# Altium PCB PCB2.PcbDoc
Units mil, origin at the board's own origin, x right, y up, seen from the top; angles counter-clockwise.
Board outline 4330.71 x 1181.1 mil, 2 copper layers (Top Layer, Bottom Layer); 9 components, 8 nets, 43 pads, 0 vias.
Unrouted connection lines stored in the file: 14.
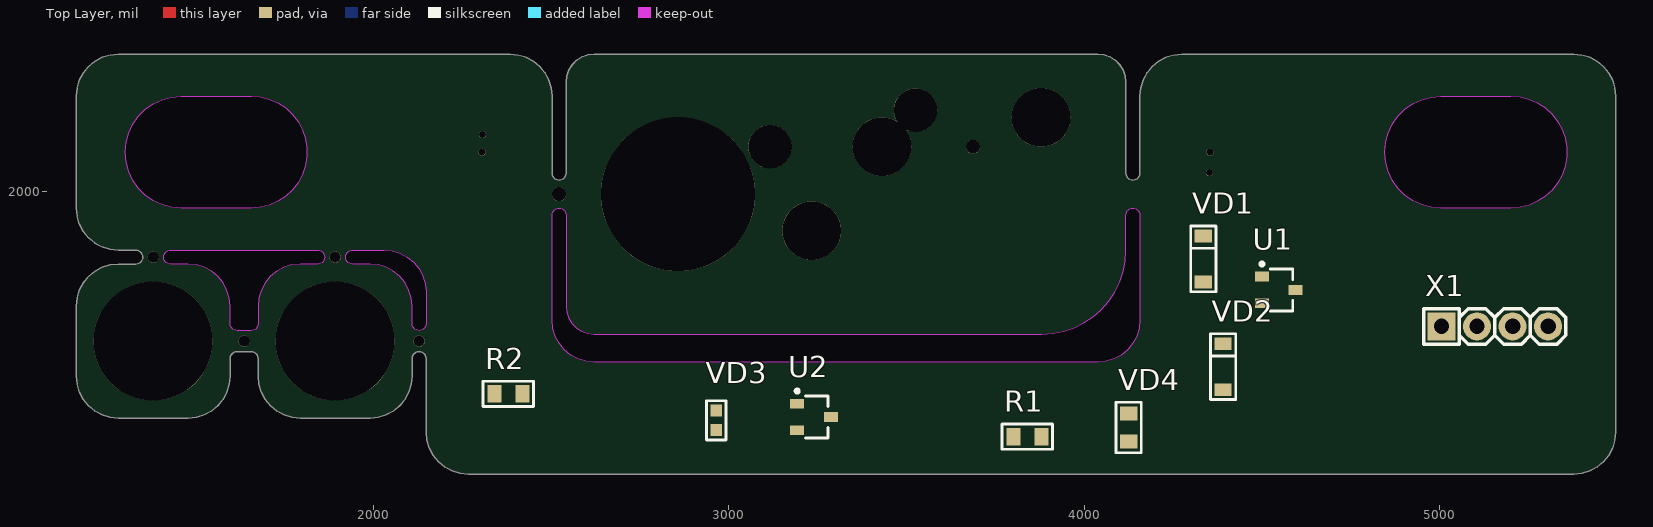
[diagram p0: Top Layer view]
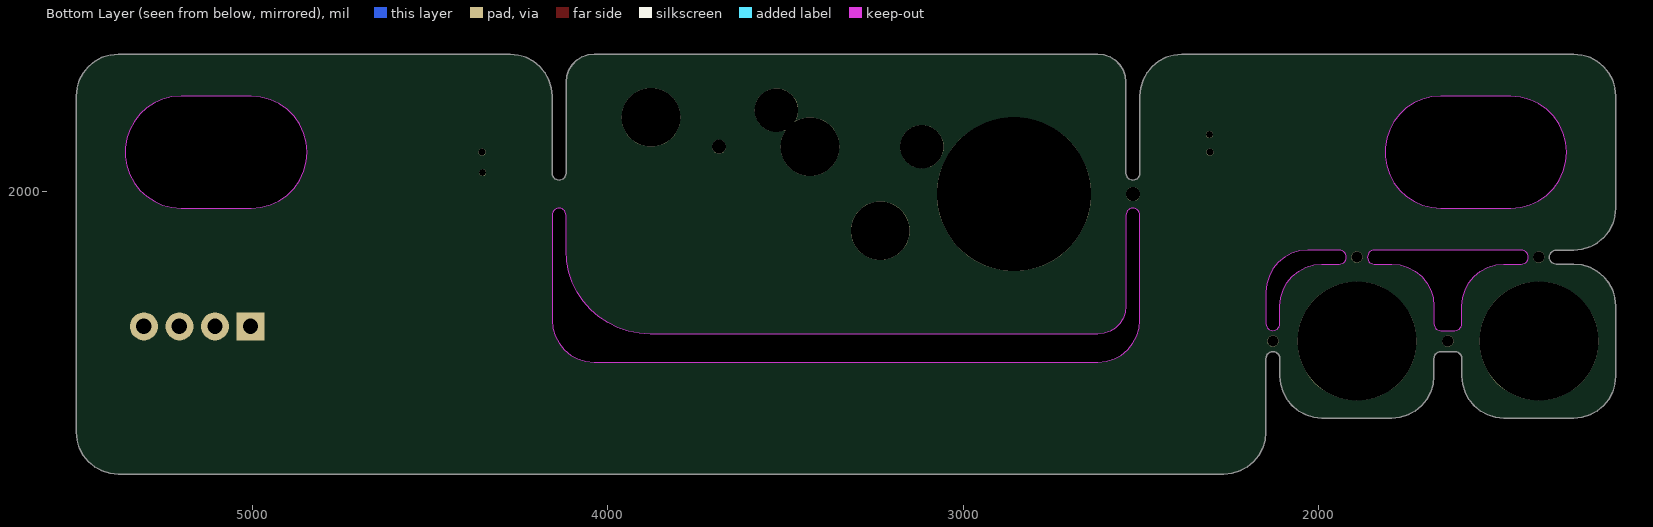
[diagram p1: Bottom Layer view, seen from below]

## Layer stack, top to bottom
Top Solder: solder mask 0.4, Solder Resist, Dk 3.5
Top Layer: signal copper 1.4
Dielectric 1: dielectric 12.6, FR-4, Dk 4.8
Bottom Layer: signal copper 1.4
Bottom Solder: solder mask 0.4, Solder Resist, Dk 3.5

## Board outline
1794.57,1361.97 1991.42,1361.97 2014.46,1364.24 2036.62,1370.96 2057.04,1381.87 2074.93,1396.56 2089.62,1414.46 2100.54,1434.88 2107.26,1457.04 2109.53,1480.08 2109.53,1529.29 2110.02,1533.67 2111.48,1537.83 2113.82,1541.56 2116.94,1544.68 2120.67,1547.03 2124.83,1548.48 2129.21,1548.98 2133.59,1548.48 2137.75,1547.03 2141.49,1544.68 2144.6,1541.56 2146.95,1537.83 2148.4,1533.67 2148.9,1529.29 2148.9,1322.6 2151.17,1299.56 2157.89,1277.4 2168.8,1256.98 2183.49,1239.08 2201.39,1224.39 2221.81,1213.48 2243.97,1206.76 2267.01,1204.49 5377.24,1204.49 5400.29,1206.76 5422.44,1213.48 5442.86,1224.39 5460.76,1239.08 5475.45,1256.98 5486.36,1277.4 5493.08,1299.56 5495.35,1322.6 5495.35,2267.48 5493.08,2290.52 5486.36,2312.68 5475.45,2333.1 5460.76,2351 5442.86,2365.69 5422.44,2376.6 5400.29,2383.32 5377.24,2385.59 4274.88,2385.59 4251.84,2383.32 4229.68,2376.6 4209.26,2365.69 4191.37,2351 4176.68,2333.1 4165.76,2312.68 4159.04,2290.52 4156.77,2267.48 4156.77,2050.94 4156.28,2046.56 4154.82,2042.4 4152.48,2038.67 4149.36,2035.55 4145.63,2033.21 4141.47,2031.75 4137.09,2031.26 4132.71,2031.75 4128.55,2033.21 4124.81,2035.55 4121.7,2038.67 4119.35,2042.4 4117.9,2046.56 4117.4,2050.94 4117.4,2306.85 4115.43,2324.37 4109.6,2341.01 4100.22,2355.94 4087.76,2368.41 4072.83,2377.79 4056.18,2383.62 4038.66,2385.59 2621.34,2385.59 2603.82,2383.62 2587.17,2377.79 2572.25,2368.41 2559.78,2355.94 2550.4,2341.01 2544.57,2324.37 2542.6,2306.85 2542.6,2050.94 2542.11,2046.56 2540.65,2042.4 2538.3,2038.67 2535.19,2035.55 2531.45,2033.21 2527.29,2031.75 2522.91,2031.26 2518.53,2031.75 2514.37,2033.21 2510.64,2035.55 2507.52,2038.67 2505.18,2042.4 2503.72,2046.56 2503.23,2050.94 2503.23,2267.48 2500.96,2290.52 2494.24,2312.68 2483.32,2333.1 2468.63,2351 2450.74,2365.69 2430.32,2376.6 2408.16,2383.32 2385.12,2385.59 1282.76,2385.59 1259.71,2383.32 1237.56,2376.6 1217.14,2365.69 1199.24,2351 1184.55,2333.1 1173.64,2312.68 1166.92,2290.52 1164.65,2267.48 1164.65,1952.52 1166.92,1929.48 1173.64,1907.32 1184.55,1886.9 1199.24,1869 1217.14,1854.31 1237.56,1843.4 1259.71,1836.68 1282.76,1834.41 1331.97,1834.41 1336.35,1833.92 1340.51,1832.46 1344.24,1830.11 1347.36,1827 1349.7,1823.27 1351.16,1819.1 1351.65,1814.72 1351.16,1810.34 1349.7,1806.18 1347.36,1802.45 1344.24,1799.33 1340.51,1796.99 1336.35,1795.53 1331.97,1795.04 1282.76,1795.04 1259.71,1792.77 1237.56,1786.05 1217.14,1775.13 1199.24,1760.45 1184.55,1742.55 1173.64,1722.13 1166.92,1699.97 1164.65,1676.93 1164.65,1480.08 1166.92,1457.04 1173.64,1434.88 1184.55,1414.46 1199.24,1396.56 1217.14,1381.87 1237.56,1370.96 1259.71,1364.24 1282.76,1361.97 1479.61,1361.97 1502.65,1364.24 1524.81,1370.96 1545.22,1381.87 1563.12,1396.56 1577.81,1414.46 1588.73,1434.88 1595.45,1457.04 1597.72,1480.08 1597.72,1529.29 1598.21,1533.67 1599.67,1537.83 1602.01,1541.56 1605.13,1544.68 1608.86,1547.03 1613.02,1548.48 1617.4,1548.98 1656.77,1548.98 1661.15,1548.48 1665.31,1547.03 1669.05,1544.68 1672.16,1541.56 1674.51,1537.83 1675.96,1533.67 1676.46,1529.29 1676.46,1480.08 1678.73,1457.04 1685.45,1434.88 1696.36,1414.46 1711.05,1396.56 1728.95,1381.87 1749.37,1370.96 1771.53,1364.24
cut-out: 1656.77,1608.03 1617.4,1608.03 1613.02,1608.52 1608.86,1609.98 1605.13,1612.33 1602.01,1615.44 1599.67,1619.18 1598.21,1623.34 1597.72,1627.72 1597.72,1676.93 1595.45,1699.97 1588.73,1722.13 1577.81,1742.55 1563.12,1760.45 1545.22,1775.13 1524.81,1786.05 1502.65,1792.77 1479.61,1795.04 1430.39,1795.04 1426.01,1795.53 1421.85,1796.99 1418.12,1799.33 1415,1802.45 1412.66,1806.18 1411.2,1810.34 1410.71,1814.72 1411.2,1819.1 1412.66,1823.27 1415,1827 1418.12,1830.11 1421.85,1832.46 1426.01,1833.92 1430.39,1834.41 1843.78,1834.41 1848.16,1833.92 1852.32,1832.46 1856.05,1830.11 1859.17,1827 1861.52,1823.27 1862.97,1819.1 1863.46,1814.72 1862.97,1810.34 1861.52,1806.18 1859.17,1802.45 1856.05,1799.33 1852.32,1796.99 1848.16,1795.53 1843.78,1795.04 1794.57,1795.04 1771.53,1792.77 1749.37,1786.05 1728.95,1775.13 1711.05,1760.45 1696.36,1742.55 1685.45,1722.13 1678.73,1699.97 1676.46,1676.93 1676.46,1627.72 1675.96,1623.34 1674.51,1619.18 1672.16,1615.44 1669.05,1612.33 1665.31,1609.98 1661.15,1608.52
cut-out: 2148.9,1716.3 2148.9,1627.72 2148.4,1623.34 2146.95,1619.18 2144.6,1615.44 2141.49,1612.33 2137.75,1609.98 2133.59,1608.52 2129.21,1608.03 2124.83,1608.52 2120.67,1609.98 2116.94,1612.33 2113.82,1615.44 2111.48,1619.18 2110.02,1623.34 2109.53,1627.72 2109.53,1676.93 2107.26,1699.97 2100.54,1722.13 2089.62,1742.55 2074.93,1760.45 2057.04,1775.13 2036.62,1786.05 2014.46,1792.77 1991.42,1795.04 1942.2,1795.04 1937.82,1795.53 1933.66,1796.99 1929.93,1799.33 1926.81,1802.45 1924.47,1806.18 1923.01,1810.34 1922.52,1814.72 1923.01,1819.1 1924.47,1823.27 1926.81,1827 1929.93,1830.11 1933.66,1832.46 1937.82,1833.92 1942.2,1834.41 2030.79,1834.41 2053.83,1832.14 2075.99,1825.42 2096.41,1814.5 2114.3,1799.82 2128.99,1781.92 2139.91,1761.5 2146.63,1739.34
cut-out: 5200.08,2267.48 5226,2265.33 5251.21,2258.95 5275.03,2248.5 5296.81,2234.27 5315.94,2216.66 5331.92,2196.13 5344.3,2173.26 5352.74,2148.66 5357.02,2123 5357.02,2097 5352.74,2071.34 5344.3,2046.74 5331.92,2023.87 5315.94,2003.34 5296.81,1985.73 5275.03,1971.5 5251.21,1961.05 5226,1954.67 5200.08,1952.52 5003.23,1952.52 4975.88,1954.91 4949.37,1962.02 4924.49,1973.62 4902,1989.36 4882.59,2008.77 4866.85,2031.26 4855.25,2056.14 4848.14,2082.65 4845.75,2110 4848.14,2137.35 4855.25,2163.86 4866.85,2188.74 4882.59,2211.23 4902,2230.64 4924.49,2246.38 4949.37,2257.98 4975.88,2265.09 5003.23,2267.48
cut-out: 1656.77,2267.48 1682.69,2265.33 1707.91,2258.95 1731.72,2248.5 1753.5,2234.27 1772.63,2216.66 1788.61,2196.13 1800.99,2173.26 1809.43,2148.66 1813.71,2123 1813.71,2097 1809.43,2071.34 1800.99,2046.74 1788.61,2023.87 1772.63,2003.34 1753.5,1985.73 1731.72,1971.5 1707.91,1961.05 1682.69,1954.67 1656.77,1952.52 1459.92,1952.52 1432.58,1954.91 1406.06,1962.02 1381.18,1973.62 1358.69,1989.36 1339.28,2008.77 1323.54,2031.26 1311.94,2056.14 1304.83,2082.65 1302.44,2110 1304.83,2137.35 1311.94,2163.86 1323.54,2188.74 1339.28,2211.23 1358.69,2230.64 1381.18,2246.38 1406.06,2257.98 1432.58,2265.09 1459.92,2267.48
cut-out: 2621.34,1598.19 3881.18,1598.19 3912.01,1600.21 3942.32,1606.24 3971.58,1616.17 3999.29,1629.84 4024.98,1647 4048.21,1667.38 4068.59,1690.61 4085.75,1716.3 4099.42,1744.01 4109.35,1773.27 4115.38,1803.58 4117.4,1834.41 4117.4,1932.83 4117.9,1937.21 4119.35,1941.38 4121.7,1945.11 4124.81,1948.22 4128.55,1950.57 4132.71,1952.03 4137.09,1952.52 4141.47,1952.03 4145.63,1950.57 4149.36,1948.22 4152.48,1945.11 4154.82,1941.38 4156.28,1937.21 4156.77,1932.83 4156.77,1637.56 4154.5,1614.52 4147.78,1592.36 4136.87,1571.94 4122.18,1554.04 4104.28,1539.35 4083.86,1528.44 4061.7,1521.72 4038.66,1519.45 2621.34,1519.45 2598.3,1521.72 2576.14,1528.44 2555.72,1539.35 2537.82,1554.04 2523.13,1571.94 2512.22,1592.36 2505.5,1614.52 2503.23,1637.56 2503.23,1932.83 2503.72,1937.21 2505.18,1941.38 2507.52,1945.11 2510.64,1948.22 2514.37,1950.57 2518.53,1952.03 2522.91,1952.52 2527.29,1952.03 2531.45,1950.57 2535.19,1948.22 2538.3,1945.11 2540.65,1941.38 2542.11,1937.21 2542.6,1932.83 2542.6,1676.93 2544.57,1659.41 2550.4,1642.76 2559.78,1627.84 2572.25,1615.37 2587.17,1605.99 2603.82,1600.16

## Design rules (kind name [scope] priority, off if disabled: settings)
Clearance [All] p1: gap=10 ignorepadtopadclearanceinfootprint=FALSE except(0: Arc-Hole Track-Hole SMDPad-Hole THPad-Hole Via-Hole Fill-Hole Poly-Hole Region-Hole Text-Hole)
PolygonConnect [All] p1: connectstyle=Relief reliefconductorwidth=10 reliefentries=4 polygonreliefangle="90 Angle" airgapwidth=10
RoomDefinition Sheet1 [InComponentClass('Sheet1')] p1: confinementstyle=ConfineIn formatcopy=TRUE lockcomponents=FALSE outline 0,0 2000,0 2000,1000 0,1000
RoutingVias [All] p1: holewidth=28 width=50 viastyle="Through Hole" minholewidth=28 minwidth=50 maxholewidth=28 maxwidth=50
SolderMaskExpansion [All] p1: expansion=4
Width [All] p1: maxlimit=10 minlimit=10 preferedwidth=10
30 further rules are at their usual default settings.

## Components (designator, comment, footprint, x,y, rotation, side; value= is the part's Value field where it differs from the comment)
R1 "1k" CH0805R 3840,1310 r0 top
R2 "1k" CH0805R 2380,1430 r0 top
U1 "Hal" A1103ELHLT-T 4547.24,1722.6 r0 top
U2 "Hal" A1103ELHLT-T 3240,1365 r0 top
VD1 "*" SOD123 4335,1745 r90 top
VD2 "*" SOD123 4390.75,1441.89 r90 top
VD3 "*" CH0603LG 2965,1355.63 r90 top
VD4 "*" CH0805LR 4125,1335.63 r90 top
X1 "*" "CON: PLS-4(90)" 5155,1620 r0 top

## Footprints (in the part's own frame and the unit in brackets; to place one, negate y for a bottom-side part, rotate by r counter-clockwise, add the part's x,y. Pads: shape width x height; smd on the part's side, far side on the other; paste and mask are expansions set on the pad)
A1103ELHLT-T [mm] "Hall Sensor SOT23"
  rect 1x0.7 smd: 1(-1.2,0.95) 2(-1.2,-0.95) 3(1.2,0)
  silkscreen extent -1.32,-1.5 1,1.97, body extent -1.45,-1.5 1.45,1.5, height 1
CH0603LG [mm] "Chip Capacitor, 2-Leads, Body 1,53x0,85mm, IPC Medium Density"
  rect 0.85x0.85 smd: 1(-0.7,0) 2(0.7,0)
  silkscreen extent -1.4,-0.7 1.4,0.7, body extent -0.8,-0.4 0.8,0.4, height 0.6
CH0805LR [mm]
  rect 1x1.25 smd: 1(-1,0) 2(1,0)
  silkscreen extent -1.8,-0.9 1.8,0.9, body extent -1.05,-0.67 1.05,0.68, height 0.9
CH0805R [mm]
  rect 1x1.25 smd: 1(-1,0) 2(1,0)
  silkscreen extent -1.8,-0.9 1.8,0.9, body extent -1,-0.6 1,0.6, height 0.44
"CON: PLS-4(90)" [mm] "PLS-40 4 pin header"
  rect 2x2 hole 1.1: 1(-3.81,0)
  round 2 hole 1.1: 2(-1.27,0) 3(1.27,0) 4(3.81,0)
  silkscreen extent -5.08,-1.27 5.08,1.27, body extent -5.08,-7.32 5.08,1.3, height 5.5
SOD123 [mm]
  rect 0.91x1.22 smd: 1(0,0) 2(3.275,0)
  round 0.5 on Mech1: 4(3,0.4)
  silkscreen extent -0.7,-0.9 4,0.9, body extent -0.25,-0.8 3.45,0.8, height 1.25

## Part data
R1 R2: library part Resistor
VD1 VD2: library part Diod
VD3 VD4: library part LED
X1: library part 4-Connector

## Free pads (board coordinates)
  round 334.65 hole 334.65: 1(1381.18,1578.5) 1(1892.99,1578.5)
  round 31.5 hole 31.5: 1(1381.18,1814.72) 1(1637.09,1578.5) 1(1892.99,1814.72) 1(2129.21,1578.5)
  round 19.68 hole 19.68: 1(2306.38,2110) 1(2307.67,2159.45) 1(4352.11,2052.31) 1(4353.62,2110)
  round 39.37 hole 39.37: 1(2522.91,1991.89) 1(3687.36,2125.35)
  round 433.07 hole 433.07: 1(2857.56,1991.89)
  round 122.05 hole 122.05: 1(2974.46,1889.13) 1(3116.5,2125.35) 1(3525.69,2228.11)
  round 165.35 hole 165.35: 1(3233.45,1889.13) 1(3431.46,2125.35) 1(3878.55,2208.11)

## Nets (pads, with @x,y where several pads share a name; then routed paths per layer and width w, separated by ;. In a path a pad name is that pad's centre, name@x,y a point inside that pad or via, vN(x,y) a via of type N, cw(c..) or ccw(c..) an arc to the next point about the centre after c; other vN are vias at no path point)
GND: U1.3 U2.3 X1.1
NetR1_1: R1.1 R2.1 U1.1 U2.1 X1.4
NetR1_2: R1.2 VD4.1
NetR2_2: R2.2 VD3.1
NetU1_2: U1.2 VD1.2 VD4.2
NetU2_2: U2.2 VD2.2 VD3.2
NetVD1_1: VD1.1 X1.3
NetVD2_1: VD2.1 X1.2
pads on no net: VD1.4 VD2.4